# Altium PCB Skyskipper1.PcbDoc
Units mil, origin at the board's own origin, x right, y up, seen from the top; angles counter-clockwise.
Board outline 4794.03 x 6230.03 mil, 2 copper layers (Top Layer, Bottom Layer); 24 components, 96 nets, 262 pads, 0 vias.
Unrouted connection lines stored in the file: 2.
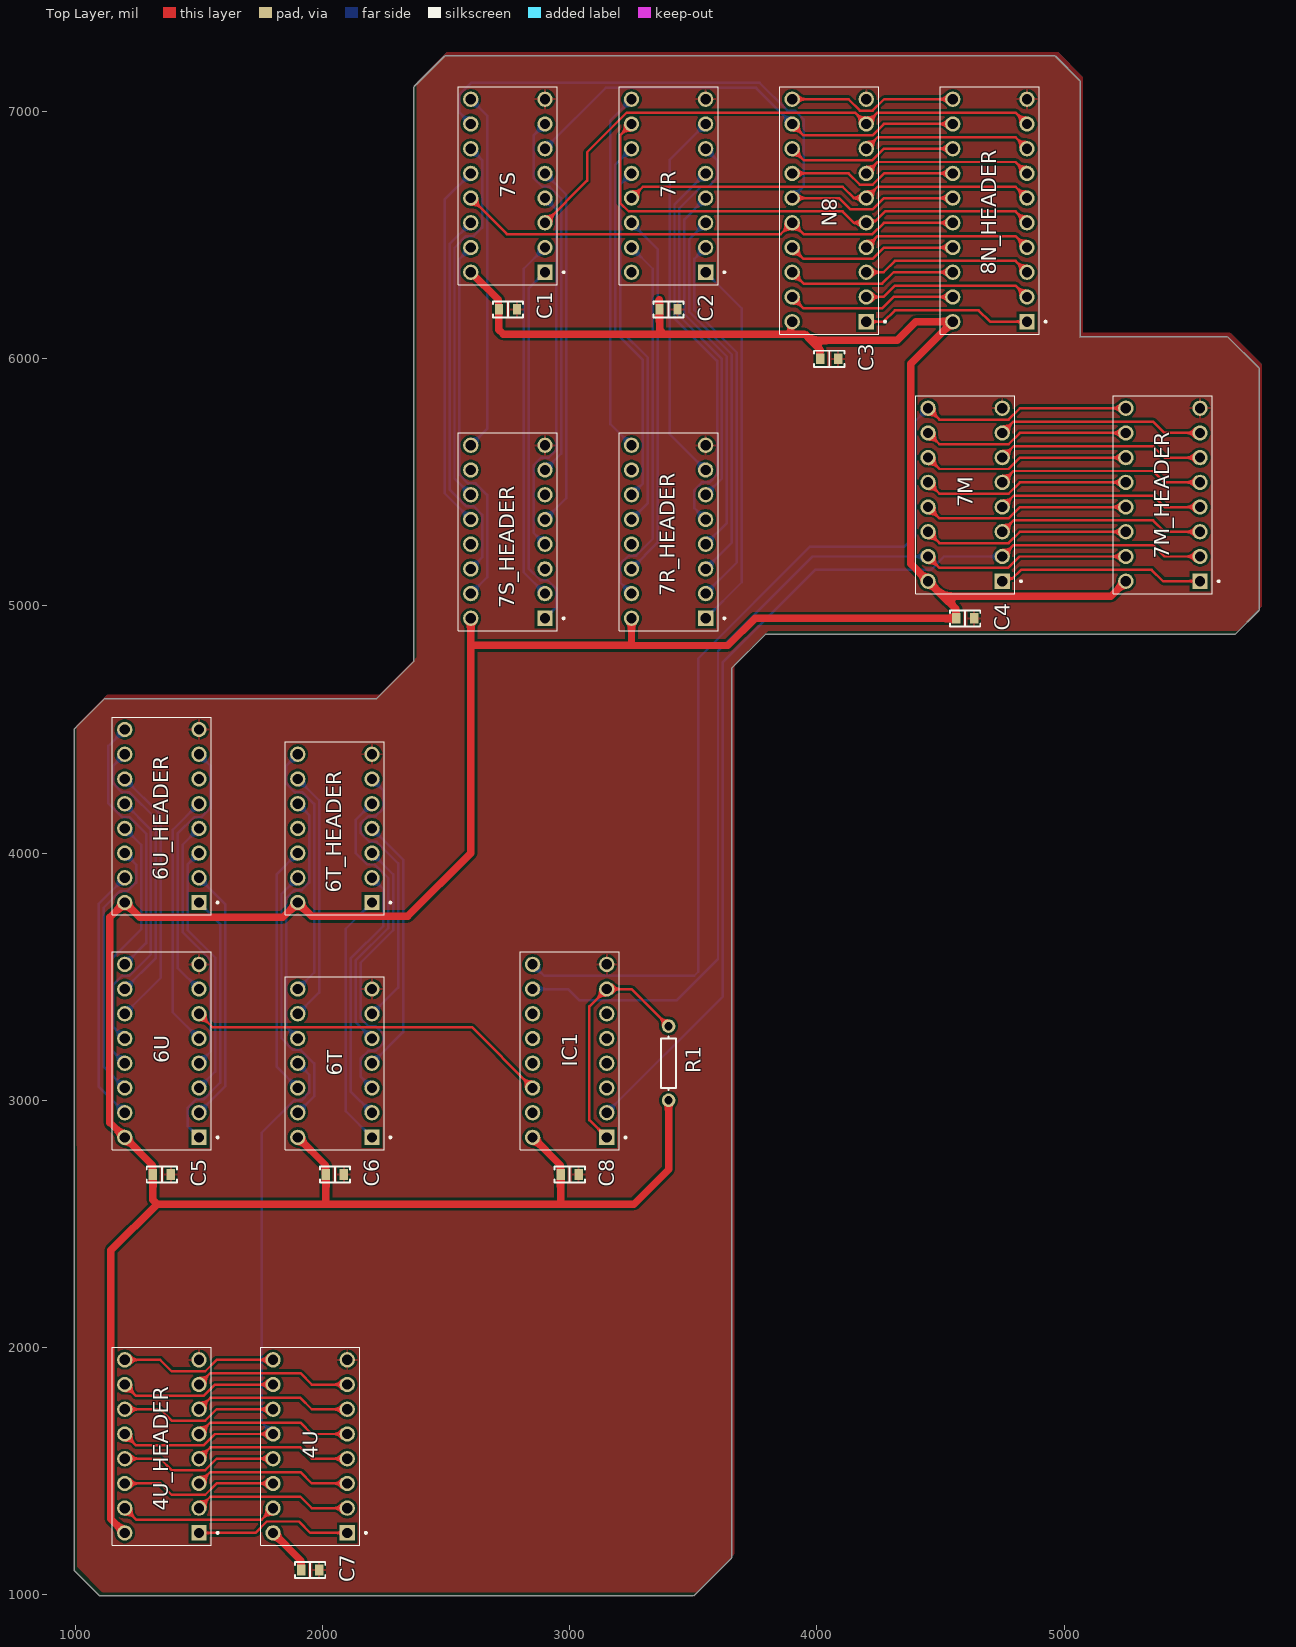
[diagram p0: Top Layer view]
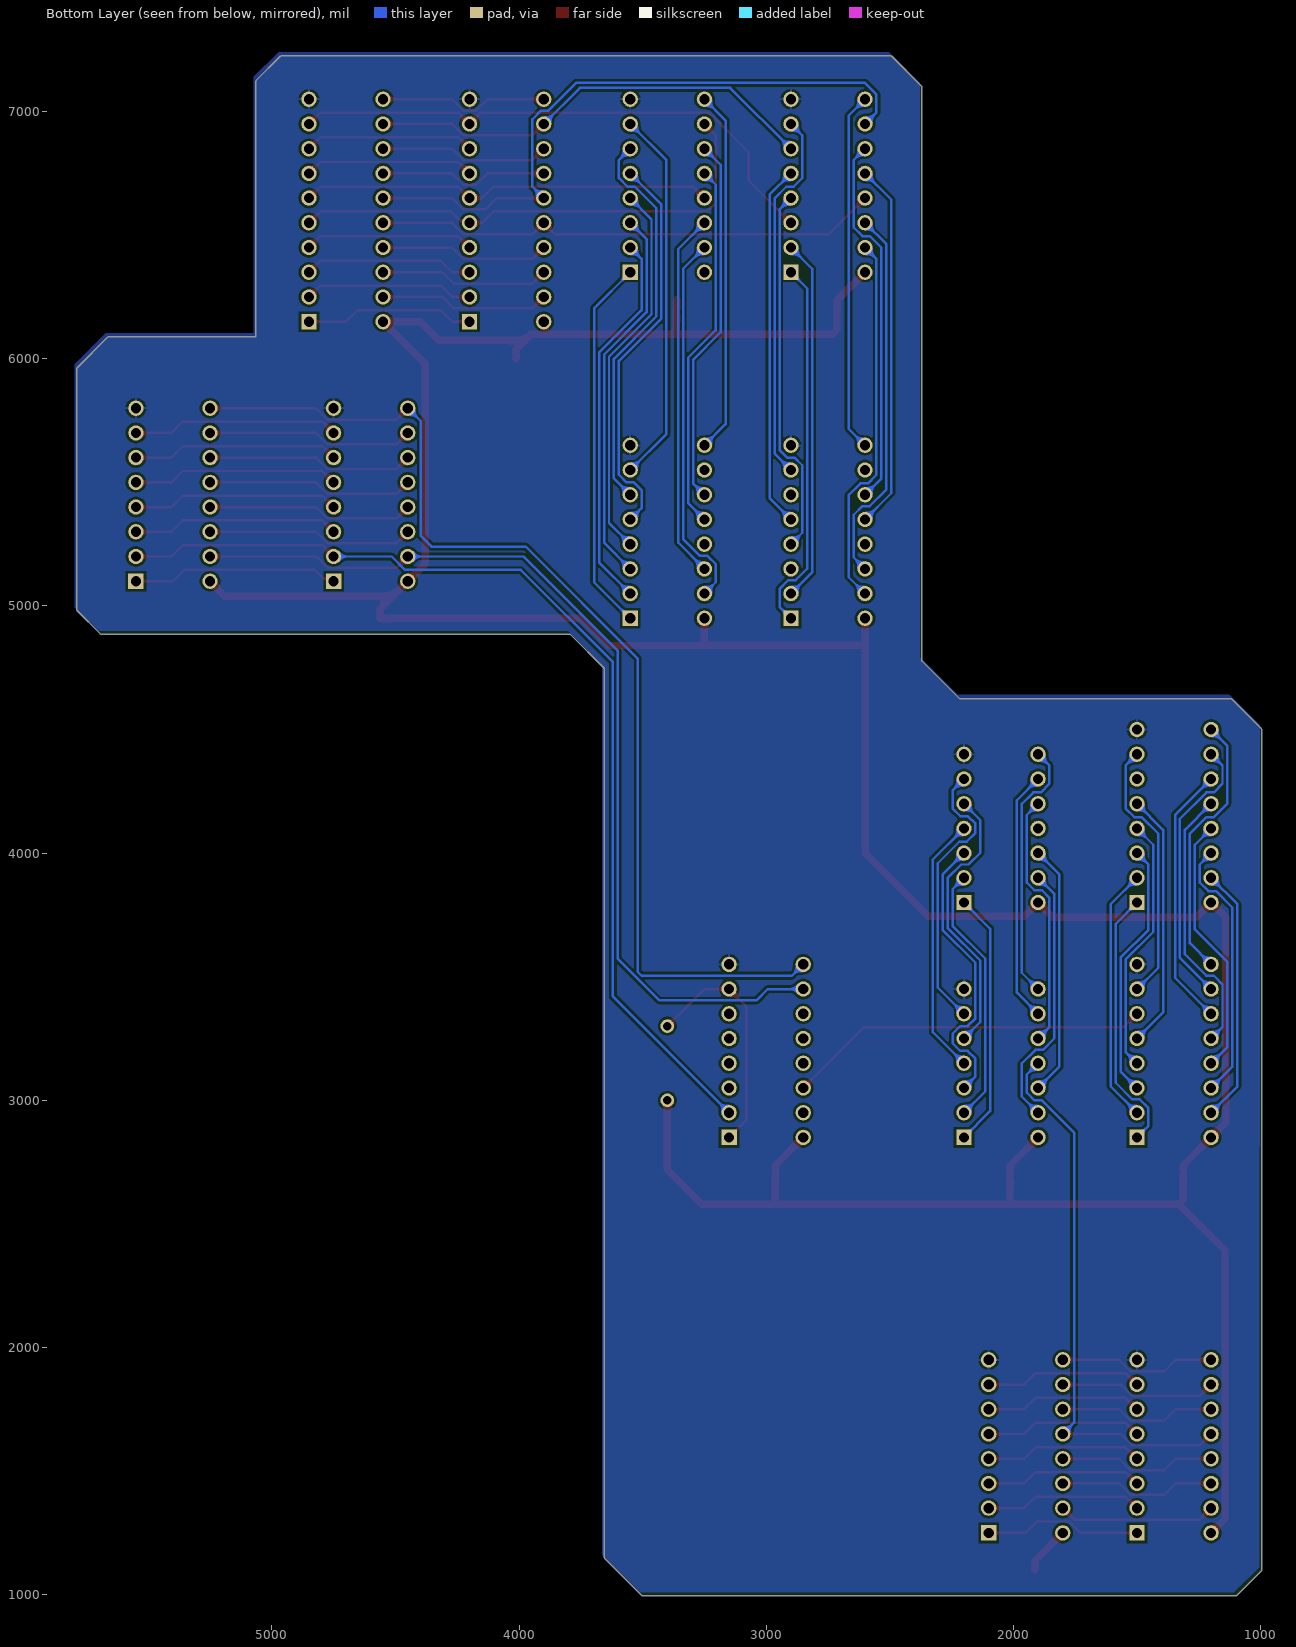
[diagram p1: Bottom Layer view, seen from below]
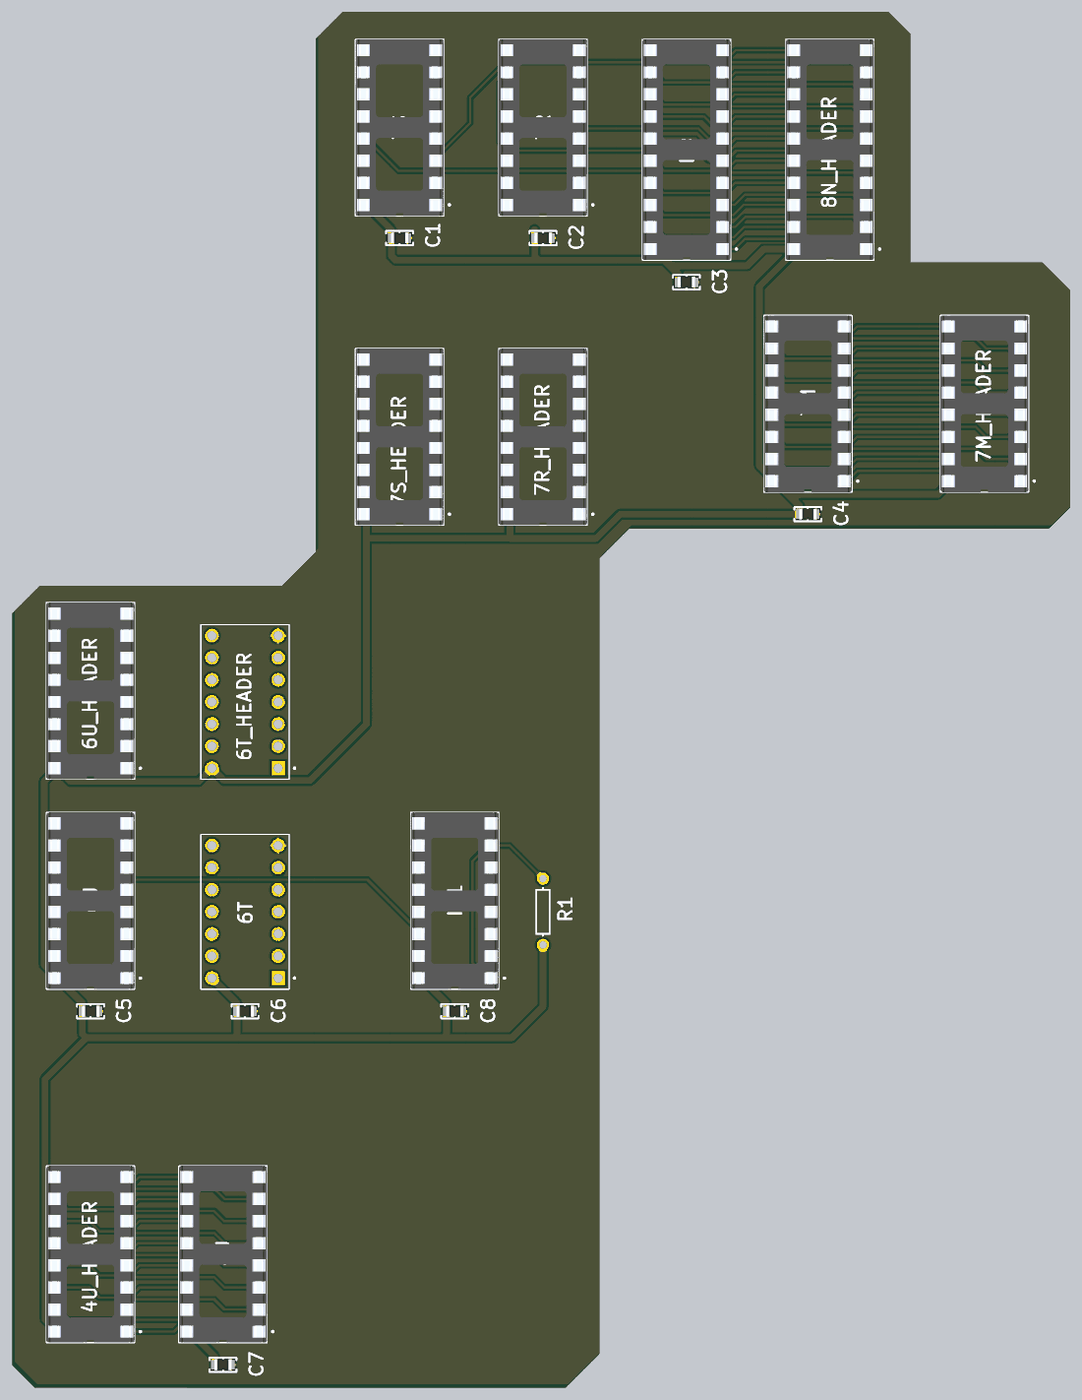
[diagram p2: 3D render of the assembled board from above, using the file's embedded part models]

## Layer stack, top to bottom
Top Solder: solder mask 0.4, Solder Resist, Dk 3.5
Top Layer: signal copper 1.4
Dielectric 1: dielectric 12.6, FR-4, Dk 4.8
Bottom Layer: signal copper 1.4
Bottom Solder: solder mask 0.4, Solder Resist, Dk 3.5

## Board outline
1096.45,996.45 996.45,1096.45 994.99,1100 994.99,4500 996.45,4503.55 1116.45,4623.55 1120,4625.02 2217.92,4625.02 2369.99,4777.08 2369.99,7099.1 2371.45,7102.64 2492.36,7223.55 2495.9,7225.02 4962.47,7225.02 4966.02,7223.55 5063.55,7126.02 5065.02,7122.47 5065.02,6089.9 5065.9,6089.02 5660.24,6089.02 5663.79,6087.55 5787.55,5963.79 5789.02,5960.24 5789.02,4984 5787.55,4980.45 5693.55,4886.45 5690,4884.98 3792.08,4884.98 3655.01,4747.92 3655.01,1150 3653.55,1146.45 3503.55,996.45 3500,994.99

## Design rules (kind name [scope] priority, off if disabled: settings)
Clearance [All] p1: gap=10 ignorepadtopadclearanceinfootprint=FALSE except(0: Arc-Hole Track-Hole SMDPad-Hole THPad-Hole Via-Hole Fill-Hole Poly-Hole Region-Hole Text-Hole)
PolygonConnect [All] p1: connectstyle=Relief reliefconductorwidth=10 reliefentries=4 polygonreliefangle="90 Angle" airgapwidth=10
RoutingVias [All] p1: holewidth=28 width=50 viastyle="Through Hole" minholewidth=28 minwidth=50 maxholewidth=28 maxwidth=50
SolderMaskExpansion [All] p1: expansion=4 istentingtop=FALSE
Width Width_1 [All] p1: maxlimit=30 minlimit=10 preferedwidth=10
Width [InNetClass('POWER')] p2: maxlimit=30 minlimit=30 preferedwidth=30
30 further rules are at their usual default settings.

## Classes and differential pairs
net class POWER: VCC

## Components (designator, comment, footprint, x,y, rotation, side; value= is the part's Value field where it differs from the comment)
4U "DILB16P-223TLF" AMPHENOL_DILB16P-223TLF 1950,1600 r180 top
4U_HEADER "DILB16P-223TLF" AMPHENOL_DILB16P-223TLF 1350,1600 r180 top
6T "DILB14P-223TLF" AMPHENOL_DILB14P-223TLF 2050,3150 r180 top
6T_HEADER "DILB14P-223TLF" AMPHENOL_DILB14P-223TLF 2050,4100 r180 top
6U "DILB16P-223TLF" AMPHENOL_DILB16P-223TLF 1350,3200 r180 top
6U_HEADER "DILB16P-223TLF" AMPHENOL_DILB16P-223TLF 1350,4150 r180 top
7M "DILB16P-223TLF" AMPHENOL_DILB16P-223TLF 4600,5450 r180 top
7M_HEADER "DILB16P-223TLF" AMPHENOL_DILB16P-223TLF 5400,5450 r180 top
7R "DILB16P-223TLF" AMPHENOL_DILB16P-223TLF 3400,6700 r180 top
7R_HEADER "DILB16P-223TLF" AMPHENOL_DILB16P-223TLF 3400,5300 r180 top
7S "DILB16P-223TLF" AMPHENOL_DILB16P-223TLF 2750,6700 r180 top
7S_HEADER "DILB16P-223TLF" AMPHENOL_DILB16P-223TLF 2750,5300 r180 top
8N "DILB20P-223TLF" AMPHENOL_DILB20P-223TLF 4050,6600 r180 top
8N_HEADER "DILB20P-223TLF" AMPHENOL_DILB20P-223TLF 4700,6600 r180 top
C1 "10000 pF" "CAP FILM 0805" 2750,6200 r180 top
C2 "10000 pF" "CAP FILM 0805" 3400,6200 r180 top
C3 "10000 pF" "CAP FILM 0805" 4050,6000 r180 top
C4 "10000 pF" "CAP FILM 0805" 4600,4950 r180 top
C5 "10000 pF" "CAP FILM 0805" 1350,2700 r180 top
C6 "10000 pF" "CAP FILM 0805" 2050,2700 r180 top
C7 "10000 pF" "CAP FILM 0805" 1950,1100 r180 top
C8 "10000 pF" "CAP FILM 0805" 3000,2700 r180 top
IC1 "DILB16P-223TLF" AMPHENOL_DILB16P-223TLF 3000,3200 r180 top
R1 "Res1" AXIAL-0.3 3400,3150 r90 top value=1K

## Footprints (in the part's own frame and the unit in brackets; to place one, negate y for a bottom-side part, rotate by r counter-clockwise, add the part's x,y. Pads: shape width x height; smd on the part's side, far side on the other; paste and mask are expansions set on the pad)
AMPHENOL_DILB14P-223TLF [mm]
  rect 1.575x1.575 hole 1.05: 01(-3.81,7.62)
  round 1.575 hole 1.05: 02(-3.81,5.08) 03(-3.81,2.54) 04(-3.81,0) 05(-3.81,-2.54) 06(-3.81,-5.08) 07(-3.81,-7.62) 08(3.81,-7.62) 09(3.81,-5.08) 10(3.81,-2.54) 11(3.81,0) 12(3.81,2.54) 13(3.81,5.08) 14(3.81,7.62)
  silkscreen extent -5.8,-8.89 5.08,8.89
AMPHENOL_DILB16P-223TLF [mm]
  rect 1.575x1.575 hole 1.05: 01(-3.81,8.89)
  round 1.575 hole 1.05: 02(-3.81,6.35) 03(-3.81,3.81) 04(-3.81,1.27) 05(-3.81,-1.27) 06(-3.81,-3.81) 07(-3.81,-6.35) 08(-3.81,-8.89) 09(3.81,-8.89) 10(3.81,-6.35) 11(3.81,-3.81) 12(3.81,-1.27) 13(3.81,1.27) 14(3.81,3.81) 15(3.81,6.35) 16(3.81,8.89)
  silkscreen extent -5.83,-10.16 5.08,10.16, body extent -5.08,-10.16 5.08,10.16, height 5.25
AMPHENOL_DILB20P-223TLF [mm]
  rect 1.575x1.575 / inner round 1.575 / far side rect 1.575x1.575 hole 1.05: 01(-3.81,11.43)
  round 1.575 hole 1.05: 02(-3.81,8.89) 03(-3.81,6.35) 04(-3.81,3.81) 05(-3.81,1.27) 06(-3.81,-1.27) 07(-3.81,-3.81) 08(-3.81,-6.35) 09(-3.81,-8.89) 10(-3.81,-11.43) 11(3.81,-11.43) 12(3.81,-8.89) 13(3.81,-6.35) 14(3.81,-3.81) 15(3.81,-1.27) 16(3.81,1.27) 17(3.81,3.81) 18(3.81,6.35) 19(3.81,8.89) 20(3.81,11.43)
  silkscreen extent -5.83,-12.7 5.08,12.7, body extent -5.08,-12.7 5.08,12.7, height 5.25
AXIAL-0.3 [mm] "Axial Device, Thru-Hole; 2 Leads; 0.3 in Pin Spacing"
  round 1.4 hole 0.85: 1(-3.81,0) 2(3.81,0)
  silkscreen extent -2.77,-0.76 2.77,0.76
"CAP FILM 0805" [mm] "J2, Film Capacitor PPS , 2-Leads, Body 2.00x1.25mm, IPC Medium Density"
  rect 0.85x1.1 smd: 1(-0.925,0) 2(0.925,0)
  silkscreen extent -1.55,-0.82 1.55,0.82, body extent -1,-0.62 1,0.62, height 1.2

## Part data
4U 4U_HEADER 6U 6U_HEADER 7M 7M_HEADER 7R 7R_HEADER 7S 7S_HEADER IC1: "DIP Socket, Stamped and Formed", Package=None, Availability="In Stock", Check_prices=https://www.snapeda.com/parts/DILB16P-223TLF/Amphenol+FCI/view-part/?ref=eda, MF="Amphenol ICC (FCI)", MP=DILB16P-223TLF, Price=None, SnapEDA_Link=https://www.snapeda.com/parts/DILB16P-223TLF/Amphenol+FCI/view-part/?ref=snap
6T 6T_HEADER: Package=None, Availability=Unavailable, MP=DILB14P-223TLF, Price=None
8N 8N_HEADER: "20 (2 x 10) Pos DIP, 0.3 (7.62mm) Row Spacing Socket Tin Through Hole", Package=None, Availability="In Stock", Check_prices=https://www.snapeda.com/parts/DILB20P-223TLF/Amphenol+FCI/view-part/?ref=eda, MF=FCI, MP=DILB20P-223TLF, Price=None, Purchase-URL=https://pricing.snapeda.com/search/part/DILB20P-223TLF/?ref=eda, SnapEDA_Link=https://www.snapeda.com/parts/DILB20P-223TLF/Amphenol+FCI/view-part/?ref=snap
C1 C2 C3 C4 C5 C6 C7 C8: library part ECH-U1C103GX5, "CAP FILM 10000PF 2% 16VDC 0805", Device Package="0805 (2012 Metric)", Dielectric Material="Polyphenylene Sulfide (PPS), Metallized - Stacked", Manufacturer="Panasonic Electronic Components", Operating Temperature="-55°C ~ 125°C", Supplier Part Number 1=PCF1177CT-ND, Tolerance=±2%, Voltage Rating - AC=11V, Voltage Rating - DC=16V, Applications="General Purpose", Capacitance="10000 pF", ComponentLink1Description=Datasheet, ComponentLink1URL=http://industrial.panasonic.com/www-cgi/jvcr13pz.cgi?E+PZ+3+ABD0013+ECHU1C103GX5+7+WW, ComponentLink2Description="DigiKey Link", ComponentLink2URL=https://www.digikey.com/en/products/detail/panasonic-electronic-components/ECH-U1C103GX5/353626, Height - Seated (Max)="0.051\" (1.30mm)", LastUpdated="2024-02-08 9:45:33 PM", Lifecycle Status=Active, Minimum Order=1, Mounting Type="Surface Mount", Package / Case="0805 (2012 Metric)", Packaging=TapeAndReel, Part Number=ECH-U1C103GX5, Part Status=Active, Price=0.13, Series=ECH-U(X), Size / Dimension="0.079\" L x 0.049\" W (2.00mm x 1.25mm)", Supplier 1=DigiKey, Termination="Solder Pads"
R1: "Resistor", LatestRevisionDate=17-Jul-2002, LatestRevisionNote="Re-released for DXP Platform.", PackageDescription="Axial Device, Thru-Hole; 2 Leads; 0.3 in Pin Spacing", PackageReference=AXIAL-0.3, Published=8-Jun-2000, Publisher="Altium Limited"

## Nets (pads, with @x,y where several pads share a name; then routed paths per layer and width w, separated by ;. In a path a pad name is that pad's centre, name@x,y a point inside that pad or via, vN(x,y) a via of type N, cw(c..) or ccw(c..) an arc to the next point about the centre after c; other vN are vias at no path point)
GND: 4U.08 4U_HEADER.08 6T.07 6T_HEADER.07 6U.08 6U_HEADER.08 7M.08 7M_HEADER.08 7R.08 7R_HEADER.08 7S.08 7S_HEADER.08 8N.10 8N_HEADER.10 C1.1 C2.1 C3.1 C4.1 C5.1 C6.1 C7.1 C8.1 IC1.08
Net4U_01: 4U.01 4U_HEADER.01 | length 638.1
  Top Layer w10: 4U_HEADER.01 1728.28,1250 1774.29,1296 1904.47,1296 1950.47,1250 4U.01
Net4U_02: 4U.02 4U_HEADER.02 | length 638.1
  Top Layer w10: 4U_HEADER.02 1546,1396 1910.43,1396 1956.44,1350 4U.02
Net4U_03: 4U.03 4U_HEADER.03 | length 638.1
  Top Layer w10: 4U_HEADER.03 1546,1496 1910.43,1496 1956.44,1450 4U.03
Net4U_04: 4U.04 4U_HEADER.04 | length 638.1
  Top Layer w10: 4U_HEADER.04 1546,1596 1910.43,1596 1956.44,1550 4U.04
Net4U_05: 4U.05 4U_HEADER.05 | length 638.1
  Top Layer w10: 4U_HEADER.05 1546,1696 1910.43,1696 1956.44,1650 4U.05
Net4U_06: 4U.06 4U_HEADER.06 | length 638.1
  Top Layer w10: 4U_HEADER.06 1546,1796 1910.43,1796 1956.44,1750 4U.06
Net4U_07: 4U.07 4U_HEADER.07 | length 638.1
  Top Layer w10: 4U_HEADER.07 1546,1896 1910.43,1896 1956.44,1850 4U.07
Net4U_09: 4U.09 4U_HEADER.09 | length 638.1
  Top Layer w10: 4U_HEADER.09 1343.56,1950 1389.57,1904 1525.71,1904 1571.72,1950 4U.09
Net4U_10: 4U.10 4U_HEADER.10 | length 638.1
  Top Layer w10: 4U_HEADER.10 1246,1804 1519.06,1804 1565.06,1850 4U.10
Net4U_11: 4U.11 4U_HEADER.11 | length 638.1
  Top Layer w10: 4U_HEADER.11 1343.56,1750 1389.57,1704 1525.71,1704 1571.72,1750 4U.11
Net4U_12: 4U.12 4U_HEADER.12 6T.11 | length 2273.4
  Top Layer w10: 4U_HEADER.12 1246,1604 1519.06,1604 1565.06,1650 4U.12
  Bottom Layer w10: 4U.12 1754,1696 1754,2869.06 1884.94,3000 1915.06,3000 1946,3030.94 1946,3104 6T.11
Net4U_13: 4U.13 4U_HEADER.13 | length 638.1
  Top Layer w10: 4U_HEADER.13 1343.56,1550 1389.57,1504 1525.71,1504 1571.72,1550 4U.13
Net4U_14: 4U.14 4U_HEADER.14 | length 638.1
  Top Layer w10: 4U_HEADER.14 1343.56,1450 1389.57,1404 1525.71,1404 1571.72,1450 4U.14
Net4U_15: 4U.15 4U_HEADER.15 | length 638.1
  Top Layer w10: 4U_HEADER.15 1246,1304 1754,1304 4U.15
Net6T_01: 6T.01 6T_HEADER.01 | length 1037.8
  Bottom Layer w10: 6T.01 2094,2956 2094,3694 6T_HEADER.01
Net6T_02: 6T.02 6T_HEADER.02 | length 1059.4
  Bottom Layer w10: 6T.02 2114,3036 2114,3573.14 2246,3705.15 2246,3854 6T_HEADER.02
Net6T_03: 6T.03 6T_HEADER.03 | length 1170.9
  Bottom Layer w10: 6T.03 2154,3096 2154,3169.06 2184.94,3200 2215.06,3200 2246,3230.94 2246,3269.06 2215.06,3300 2184.94,3300 2154,3330.94 2154,3556.57 2286,3688.58 2286,3914 6T_HEADER.03
Net6T_04: 6T.04 6T_HEADER.04 | length 1054.4
  Bottom Layer w10: 6T.04 2326,3276 2326,3974 6T_HEADER.04
Net6T_05: 6T.05 6T_HEADER.05 | length 1131.7
  Bottom Layer w10: 6T.05 2134,3316 2134,3564.85 2266,3696.86 2266,3899.06 2211.06,3954 2180.94,3954 2134,4000.94 2134,4134 6T_HEADER.05
Net6T_06: 6T.06 6T_HEADER.06 | length 1149.3
  Bottom Layer w10: 6T.06 2306,3456 2306,3959.06 2219.06,4046 2188.94,4046 2154,4080.94 2154,4119.06 2184.94,4150 2215.06,4150 2246,4180.94 2246,4254 6T_HEADER.06
Net6T_08: 6T.08 6T_HEADER.08 | length 1060.4
  Bottom Layer w10: 6T.08 1966,3516 1966,4199.06 1919.06,4246 1888.94,4246 1854,4280.94 1854,4354 6T_HEADER.08
Net6T_09: 6T.09 6T_HEADER.09 | length 1021.2
  Bottom Layer w10: 6T.09 1986,3436 1986,4214 6T_HEADER.09
Net6T_10: 6T.10 6T_HEADER.10 | length 1043.9
  Bottom Layer w10: 6T.10 1854,3296 1854,3819.06 1884.94,3850 1915.06,3850 1946,3880.94 1946,4154 6T_HEADER.10
Net6T_12: 6T.12 6T_HEADER.12 | length 1021.2
  Bottom Layer w10: 6T.12 1814,3136 1814,3914 6T_HEADER.12
Net6T_13: 6T.13 6T_HEADER.13 | length 1077
  Bottom Layer w10: 6T.13 1966,3016 1966,3149.06 1911.06,3204 1880.94,3204 1834,3250.94 1834,3834 6T_HEADER.13
Net6U_01: 6U.01 6U_HEADER.01 | length 1077
  Bottom Layer w10: 6U.01 1454,2896 1454,2969.06 1488.94,3004 1519.06,3004 1586,3070.94 1586,3714 6U_HEADER.01
Net6U_02: 6U.02 6U_HEADER.02 | length 1037.8
  Bottom Layer w10: 6U.02 1606,3056 1606,3794 6U_HEADER.02
Net6U_03: 6U.03 6U_HEADER.03 | length 1042.8
  Bottom Layer w10: 6U.03 1566,3116 1566,3577.34 1454,3689.35 1454,3954 6U_HEADER.03
Net6U_04: 6U.04 6U_HEADER.04 | length 1042.8
  Bottom Layer w10: 6U.04 1546,3196 1546,3569.06 1434,3681.06 1434,4034 6U_HEADER.04
Net6U_05: 6U.05 6U_HEADER.05 | length 1037.8
  Bottom Layer w10: 6U.05 1394,3356 1394,4094 6U_HEADER.05
Net6U_06: 6U.06 IC1.14 | length 1474.3
  Top Layer w10: 6U.06 1554,3296 2604,3296 IC1.14
Net6U_07: 6U.07 6U_HEADER.07 | length 1077
  Bottom Layer w10: 6U.07 1414,3536 1414,4079.06 1480.94,4146 1511.06,4146 1546,4180.94 1546,4354 6U_HEADER.07
Net6U_09: 6U.09 6U_HEADER.09 | length 1093.6
  Bottom Layer w10: 6U.09 1286,3636 1286,4079.06 1219.06,4146 1188.94,4146 1134,4200.94 1134,4434 6U_HEADER.09
Net6U_10: 6U.10 6U_HEADER.10 | length 1110.1
  Bottom Layer w10: 6U.10 1326,3576 1326,4139.05 1219.06,4246 1188.94,4246 1154,4280.94 1154,4354 6U_HEADER.10
Net6U_11: 6U.11 6U_HEADER.11 | length 1071
  Bottom Layer w10: 6U.11 1346,3496 1346,4154 6U_HEADER.11
Net6U_12: 6U.12 6U_HEADER.12 | length 1093.6
  Bottom Layer w10: 6U.12 1154,3296 1154,3469.06 1188.94,3504 1219.06,3504 1306,3590.95 1306,4094 6U_HEADER.12
Net6U_13: 6U.13 6U_HEADER.13 | length 1059.4
  Bottom Layer w10: 6U.13 1134,3216 1134,3559 1266,3691 1266,4034 6U_HEADER.13
Net6U_14: 6U.14 6U_HEADER.14 | length 1077
  Bottom Layer w10: 6U.14 1114,3136 1114,3779.06 1180.94,3846 1211.06,3846 1246,3880.94 1246,3954 6U_HEADER.14
Net6U_15: 6U.15 6U_HEADER.15 | length 1037.8
  Bottom Layer w10: 6U.15 1094,3056 1094,3794 6U_HEADER.15
Net7M_01: 7M.01 7M_HEADER.01 | length 838.1
  Top Layer w10: 7M.01 4760.15,5110.15 4790.15,5110.15 4826,5146 5354.47,5146 5400.47,5100 7M_HEADER.01
Net7M_02: 7M.02 7M_HEADER.02 IC1.02 | length 4162.6
  Top Layer w10: 7M.02 4796,5246 5360.43,5246 5406.44,5200 7M_HEADER.02
  Bottom Layer w10: IC1.02 3620,3420 3620,4772.88 3993.13,5146 4461.06,5146 4515.06,5200 7M.02
Net7M_03: 7M.03 7M_HEADER.03 | length 838.1
  Top Layer w10: 7M.03 4796,5346 5360.43,5346 5406.44,5300 7M_HEADER.03
Net7M_04: 7M.04 7M_HEADER.04 | length 838.1
  Top Layer w10: 7M.04 4796,5446 5360.43,5446 5406.44,5400 7M_HEADER.04
Net7M_05: 7M.05 7M_HEADER.05 | length 838.1
  Top Layer w10: 7M.05 4796,5546 5360.43,5546 5406.44,5500 7M_HEADER.05
Net7M_06: 7M.06 7M_HEADER.06 | length 838.1
  Top Layer w10: 7M.06 4796,5646 5360.43,5646 5406.44,5600 7M_HEADER.06
Net7M_07: 7M.07 7M_HEADER.07 | length 838.1
  Top Layer w10: 7M.07 4796,5746 5360.43,5746 5406.44,5700 7M_HEADER.07
Net7M_09: 7M.09 7M_HEADER.09 IC1.09 | length 4422.5
  Top Layer w10: 7M.09 4496,5754 4775.71,5754 4821.72,5800 7M_HEADER.09
  Bottom Layer w10: IC1.09 2896,3504 3504,3504 3520,3520 3520,4787.3 3972.7,5240 4354.14,5240 4397.1,5282.95 4397.1,5747.1 7M.09
Net7M_10: 7M.10 7M_HEADER.10 | length 838.1
  Top Layer w10: 7M.10 4496,5654 4775.71,5654 4821.72,5700 7M_HEADER.10
Net7M_11: 7M.11 7M_HEADER.11 | length 838.1
  Top Layer w10: 7M.11 4496,5554 4775.71,5554 4821.72,5600 7M_HEADER.11
Net7M_12: 7M.12 7M_HEADER.12 | length 838.1
  Top Layer w10: 7M.12 4496,5454 4775.71,5454 4821.72,5500 7M_HEADER.12
Net7M_13: 7M.13 7M_HEADER.13 | length 838.1
  Top Layer w10: 7M.13 4496,5354 4775.71,5354 4821.72,5400 7M_HEADER.13
Net7M_14: 7M.14 7M_HEADER.14 | length 838.1
  Top Layer w10: 7M.14 4496,5254 4775.71,5254 4821.72,5300 7M_HEADER.14
Net7M_15: 7M.15 7M_HEADER.15 IC1.10 | length 3931.1
  Top Layer w10: 7M.15 4496,5154 4774,5154 4820,5200 7M_HEADER.15
  Bottom Layer w10: IC1.10 2993.56,3450 3039.57,3404 3432.28,3404 3600,3571.72 3600,4817.87 3982.13,5200 7M.15
Net7R_01: 7R.01 7R_HEADER.01 | length 1521
  Bottom Layer w10: 7R_HEADER.01 3696,5096 3696,6204 7R.01
Net7R_02: 7R.02 7R_HEADER.02 | length 1542.5
  Bottom Layer w10: 7R_HEADER.02 3676,5176 3676,6024.71 3504,6196.71 3504,6404 7R.02
Net7R_03: 7R.03 7R_HEADER.03 | length 1542.5
  Bottom Layer w10: 7R_HEADER.03 3656,5256 3656,6016.42 3484,6188.43 3484,6484 7R.03
Net7R_04: 7R.04 7R_HEADER.04 | length 1542.5
  Bottom Layer w10: 7R_HEADER.04 3636,5336 3636,6008.14 3464,6180.15 3464,6564 7R.04
Net7R_05: 7R.05 7R_HEADER.05 | length 1598.3
  Bottom Layer w10: 7R_HEADER.05 3504,5396 3504,5469.06 3534.94,5500 3565.06,5500 3596,5530.94 3596,5991.57 3424,6163.58 3424,6624 7R.05
Net7R_06: 7R.06 7R_HEADER.06 | length 1598.3
  Bottom Layer w10: 7R_HEADER.06 3616,5516 3616,5999.85 3444,6171.86 3444,6609.06 3530.94,6696 3561.06,6696 3596,6730.94 3596,6804 7R.06
Net7R_07: 7R.07 7R_HEADER.07 | length 1521
  Bottom Layer w10: 7R_HEADER.07 3404,5696 3404,6804 7R.07
Net7R_09: 7R.09 7R_HEADER.09 | length 1471.2
  Bottom Layer w10: 7R_HEADER.09 3164,5736 3164,6964 7R.09
Net7R_10: 7R.10 8N.05 8N_HEADER.05 | length 2055.8
  Top Layer w10: 7R.10 3204,6904 3204,6630.94 3238.94,6596 4104,6596 4150,6550 8N.05 4207.53,6557.53 4237.53,6557.53 4276,6596 4804,6596 8N_HEADER.05
Net7R_11: 7R.11 7R_HEADER.11 | length 1492.8
  Bottom Layer w10: 7R_HEADER.11 3296,5496 3296,5995.71 3184,6107.72 3184,6784 7R.11
Net7R_12: 7R.12 7R_HEADER.12 | length 1492.8
  Bottom Layer w10: 7R_HEADER.12 3316,5416 3316,6004 3204,6116 3204,6704 7R.12
Net7R_13: 7R.13 8N.06 8N_HEADER.06 | length 1676.2
  Top Layer w10: 7R.13 3296,6696 4104,6696 4150,6650 8N.06 4246,6696 4804,6696 8N_HEADER.06
Net7R_14: 7R.14 7R_HEADER.14 | length 1487.8
  Bottom Layer w10: 7R_HEADER.14 3356,5256 3356,6444 7R.14
Net7R_15: 7R.15 7R_HEADER.15 | length 1527
  Bottom Layer w10: 7R_HEADER.15 3204,5096 3204,5169.06 3238.94,5204 3269.06,5204 3336,5270.94 3336,6364 7R.15
Net7S_01: 7S.01 7S_HEADER.01 | length 1510.4
  Bottom Layer w10: 7S_HEADER.01 2946,4996 2946,5069.06 2911.06,5104 2880.94,5104 2834,5150.94 2834,6284 7S.01
Net7S_02: 7S.02 7S_HEADER.02 | length 1471.2
  Bottom Layer w10: 7S_HEADER.02 2814,5136 2814,6364 7S.02
Net7S_03: 7S.03 8N.09 8N_HEADER.09 | length 2259.3
  Top Layer w10: 7S.03 3070.45,6720.45 3070.45,6835.51 3230.94,6996 4154,6996 8N.09 4246,6996 4804,6996 8N_HEADER.09
Net7S_04: 7S.04 7S_HEADER.04 | length 1493.9
  Bottom Layer w10: 7S_HEADER.04 2854,5296 2854,5569.06 2884.94,5600 2915.06,5600 2946,5630.94 2946,6604 7S.04
Net7S_05: 7S.05 7S_HEADER.05 | length 1471.2
  Bottom Layer w10: 7S_HEADER.05 2986,5436 2986,6664 7S.05
Net7S_06: 7S.06 8N.12 8N_HEADER.12 | length 1850.5
  Top Layer w10: 8N.12 3946,6904 4225,6904 4271,6950 8N_HEADER.12
  Bottom Layer w10: 7S.06 3146,7096 3754,7096 8N.12
Net7S_07: 7S.07 7S_HEADER.07 | length 1510.4
  Bottom Layer w10: 7S_HEADER.07 2966,5616 2966,6649.06 2919.06,6696 2888.94,6696 2854,6730.94 2854,6904 7S.07
Net7S_09: 7S.09 7S_HEADER.09 | length 1454.7
  Bottom Layer w10: 7S_HEADER.09 2666,5716 2666,6984 7S.09
Net7S_10: 7S.10 8N.15 8N_HEADER.15 | length 2636.7
  Top Layer w10: 8N.15 4090,6650 4136,6604 4225.71,6604 4271.72,6650 8N_HEADER.15
  Bottom Layer w10: 7S.10 2554,6996 2554,7069.06 2600.94,7116 3768.94,7116 3880.94,7004 3911.06,7004 3946,6969.06 3946,6696 8N.15
Net7S_11: 7S.11 7S_HEADER.11 | length 1510.4
  Bottom Layer w10: 7S_HEADER.11 2534,5516 2534,6449.06 2580.94,6496 2611.06,6496 2646,6530.94 2646,6804 7S.11
Net7S_12: 7S.12 7S_HEADER.12 | length 1487.8
  Bottom Layer w10: 7S_HEADER.12 2494,5456 2494,6644 7S.12
Net7S_13: 7S.13 8N.16 8N_HEADER.16 | length 2067.6
  Top Layer w10: 7S.13 2746,6504 3854,6504 8N.16 3946,6504 4225,6504 4271,6550 8N_HEADER.16
Net7S_14: 7S.14 7S_HEADER.14 | length 1527
  Bottom Layer w10: 7S_HEADER.14 2646,5196 2646,5369.06 2611.06,5404 2580.94,5404 2514,5470.94 2514,6464 7S.14
Net7S_15: 7S.15 7S_HEADER.15 | length 1510.4
  Bottom Layer w10: 7S_HEADER.15 2666,5116 2666,5449.06 2619.06,5496 2588.94,5496 2554,5530.94 2554,6404 7S.15
Net8N_01: 8N.01 8N_HEADER.01 | length 688.1
  Top Layer w10: 8N.01 4270,6150 4316,6196 4654.47,6196 4700.47,6150 8N_HEADER.01
Net8N_02: 8N.02 8N_HEADER.02 | length 688.1
  Top Layer w10: 8N.02 4270,6250 4316,6296 4804,6296 8N_HEADER.02
Net8N_03: 8N.03 8N_HEADER.03 | length 688.1
  Top Layer w10: 8N.03 4270,6350 4316,6396 4804,6396 8N_HEADER.03
Net8N_04: 8N.04 8N_HEADER.04 | length 688.1
  Top Layer w10: 8N.04 4246,6496 4804,6496 8N_HEADER.04
Net8N_07: 8N.07 8N_HEADER.07 | length 688.1
  Top Layer w10: 8N.07 4246,6796 4804,6796 8N_HEADER.07
Net8N_08: 8N.08 8N_HEADER.08 | length 688.1
  Top Layer w10: 8N.08 4246,6896 4804,6896 8N_HEADER.08
Net8N_11: 8N.11 8N_HEADER.11 | length 688.1
  Top Layer w10: 8N.11 4128.28,7050 4174.29,7004 4225.71,7004 4271.72,7050 8N_HEADER.11
Net8N_13: 8N.13 8N_HEADER.13 | length 688.1
  Top Layer w10: 8N.13 3946,6804 4225,6804 4271,6850 8N_HEADER.13
Net8N_14: 8N.14 8N_HEADER.14 | length 688.1
  Top Layer w10: 8N.14 4128.28,6750 4174.29,6704 4225.71,6704 4271.72,6750 8N_HEADER.14
Net8N_17: 8N.17 8N_HEADER.17 | length 688.1
  Top Layer w10: 8N.17 3946,6404 4225,6404 4271,6450 8N_HEADER.17
Net8N_18: 8N.18 8N_HEADER.18 | length 688.1
  Top Layer w10: 8N.18 3946,6304 4264,6304 4310,6350 8N_HEADER.18
Net8N_19: 8N.19 8N_HEADER.19 | length 688.1
  Top Layer w10: 8N.19 3946,6204 4264,6204 4310,6250 8N_HEADER.19
NetIC1_01: IC1.01 IC1.07 R1.2 | length 970.1
  Top Layer w10: IC1.01 3080,2920 3080,3380 IC1.07 3250,3450 R1.2
VCC: 4U.16 4U_HEADER.16 6T.14 6T_HEADER.14 6U.16 6U_HEADER.16 7M.16 7M_HEADER.16 7R.16 7R_HEADER.16 7S.16 7S_HEADER.16 8N.20 8N_HEADER.20 C1.2 C2.2 C3.2 C4.2 C5.2 C6.2 C7.2 C8.2 IC1.16 R1.1 | length 15220.7
  Top Layer w30: 4U_HEADER.16 1144,1306 1144,2392.86 1331.13,2580 ; C5.2 1313.56,2597.57 1331.13,2580 ; C5.2@1315.32,2698.27 1311.85,2701.73 1311.85,2738.15 6U.16 1140,2910 1140,3740 6U_HEADER.16 1260,3740 1840,3740 6T_HEADER.14 1956,3744 2344,3744 2600,4000 2600,4840.27 ; 4U.16 1911.85,1138.15 1911.85,1101.73 C7.2 ; 6T.14 2011.85,2738.15 2011.85,2701.73 C6.2 2013.58,2581.02 2012.56,2580 ; 7S_HEADER.16 2600,4840.27 ; 7S.16 2711.85,6238.15 2711.85,6204.02 C1.2@2714.73,6201.14 ; C1.2@2713.64,6199.95 2713.64,6117.57 2731.21,6100 3381.16,6100 ; IC1.16 2961.85,2738.15 2961.85,2701.73 C8.2 2963.58,2580.97 2964.55,2580 ; 7R_HEADER.16 3250,4840.4 ; 3361.85,6238.15 3361.85,6201.73 C2.2 3363.58,6117.57 3381.16,6100 ; R1.1 3400,2720 3260,2580 2964.55,2580 ; 8N.20@3892.51,6150 8N.20 3893.88,6143.88 3893.88,6111.45 3882.43,6100 ; C3.2 4011.85,6001.73 4011.85,6038.15 3975.33,6074.67 ; 7M_HEADER.16 5190,5040 4510,5040 ; 1331.13,2580 2012.56,2580 ; 2012.56,2580 2964.55,2580 ; 2600,4840.27 2600.13,4840.4 3250,4840.4 ; 3250,4840.4 3250.4,4840 3640,4840 3750,4950 C4.2 4561.85,4951.73 4561.85,4988.15 4510,5040 ; 3381.16,6100 3882.43,6100 ; 3882.43,6100 3893.88,6100 3950,6100 3975.33,6074.67 ; 3975.33,6074.67 4324.67,6074.67 4400,6150 8N_HEADER.20 4380,5980 4380,5170 7M.16 4510,5040
pads on no net: 6T_HEADER.11 6U_HEADER.06 7R_HEADER.10 7R_HEADER.13 7S_HEADER.03 7S_HEADER.06 7S_HEADER.10 7S_HEADER.13 IC1.03 IC1.04 IC1.05 IC1.06 IC1.11 IC1.12 IC1.13 IC1.15

## Polygon pours and split planes (outlines as drawn)
GND on Bottom Layer "GND_L02_P002" (solid, pour order 2): 1005.42,1111.47 1105.42,1011.47 1108.96,1010 3508.96,1010 3512.51,1011.47 3662.51,1161.47 3663.98,1165.02 3663.98,4762.94 3801.04,4900 5698.96,4900 5702.51,4901.47 5796.51,4995.47 5797.98,4999.02 5797.98,5975.26 5796.51,5978.8 5672.75,6102.56 5669.2,6104.03 5074.86,6104.03 5073.98,6104.91 5073.98,7137.49 5072.51,7141.04 4974.98,7238.56 4971.44,7240.03 2504.87,7240.03 2501.32,7238.56 2380.42,7117.66 2378.95,7114.11 2378.95,4792.09 2226.88,4640.03 1128.96,4640.03 1125.42,4638.56 1005.42,4518.56 1003.95,4515.02
GND on Top Layer "GND_L01_P003" (solid, pour order 3): 1007.43,1112.11 1107.43,1012.11 1110.98,1010.64 3510.98,1010.64 3514.53,1012.11 3664.53,1162.11 3666,1165.66 3666,4763.58 3803.06,4900.64 5700.98,4900.64 5704.53,4902.11 5798.53,4996.11 5800,4999.66 5800,5975.9 5798.53,5979.45 5674.77,6103.2 5671.22,6104.67 5076.88,6104.67 5076,6105.56 5076,7138.13 5074.53,7141.68 4977,7239.2 4973.45,7240.67 2506.88,7240.67 2503.34,7239.2 2382.43,7118.3 2380.97,7114.75 2380.97,4792.74 2228.9,4640.67 1130.98,4640.67 1127.43,4639.2 1007.43,4519.2 1005.97,4515.66

## Silkscreen, mask and mechanical layers (free items; w line width, h text height)
Drill Guide:
  lines w10: 5060,6089.9 5060,7122.47 4962.47,7220 2495.9,7220 2375,7099.1 2375,4775 2220,4620 1120,4620 1000,4500 1000,1100 1100,1000 3500,1000 3650,1150 3650,4620 3650,4750 3790,4890 5060,4890 5690,4890 5784,4984 5784,5960.24 5660.24,6084 5065.9,6084